# EAGLE board ArduinoShield-RFEngine-LLC-v00 (EAGLE 5.11)
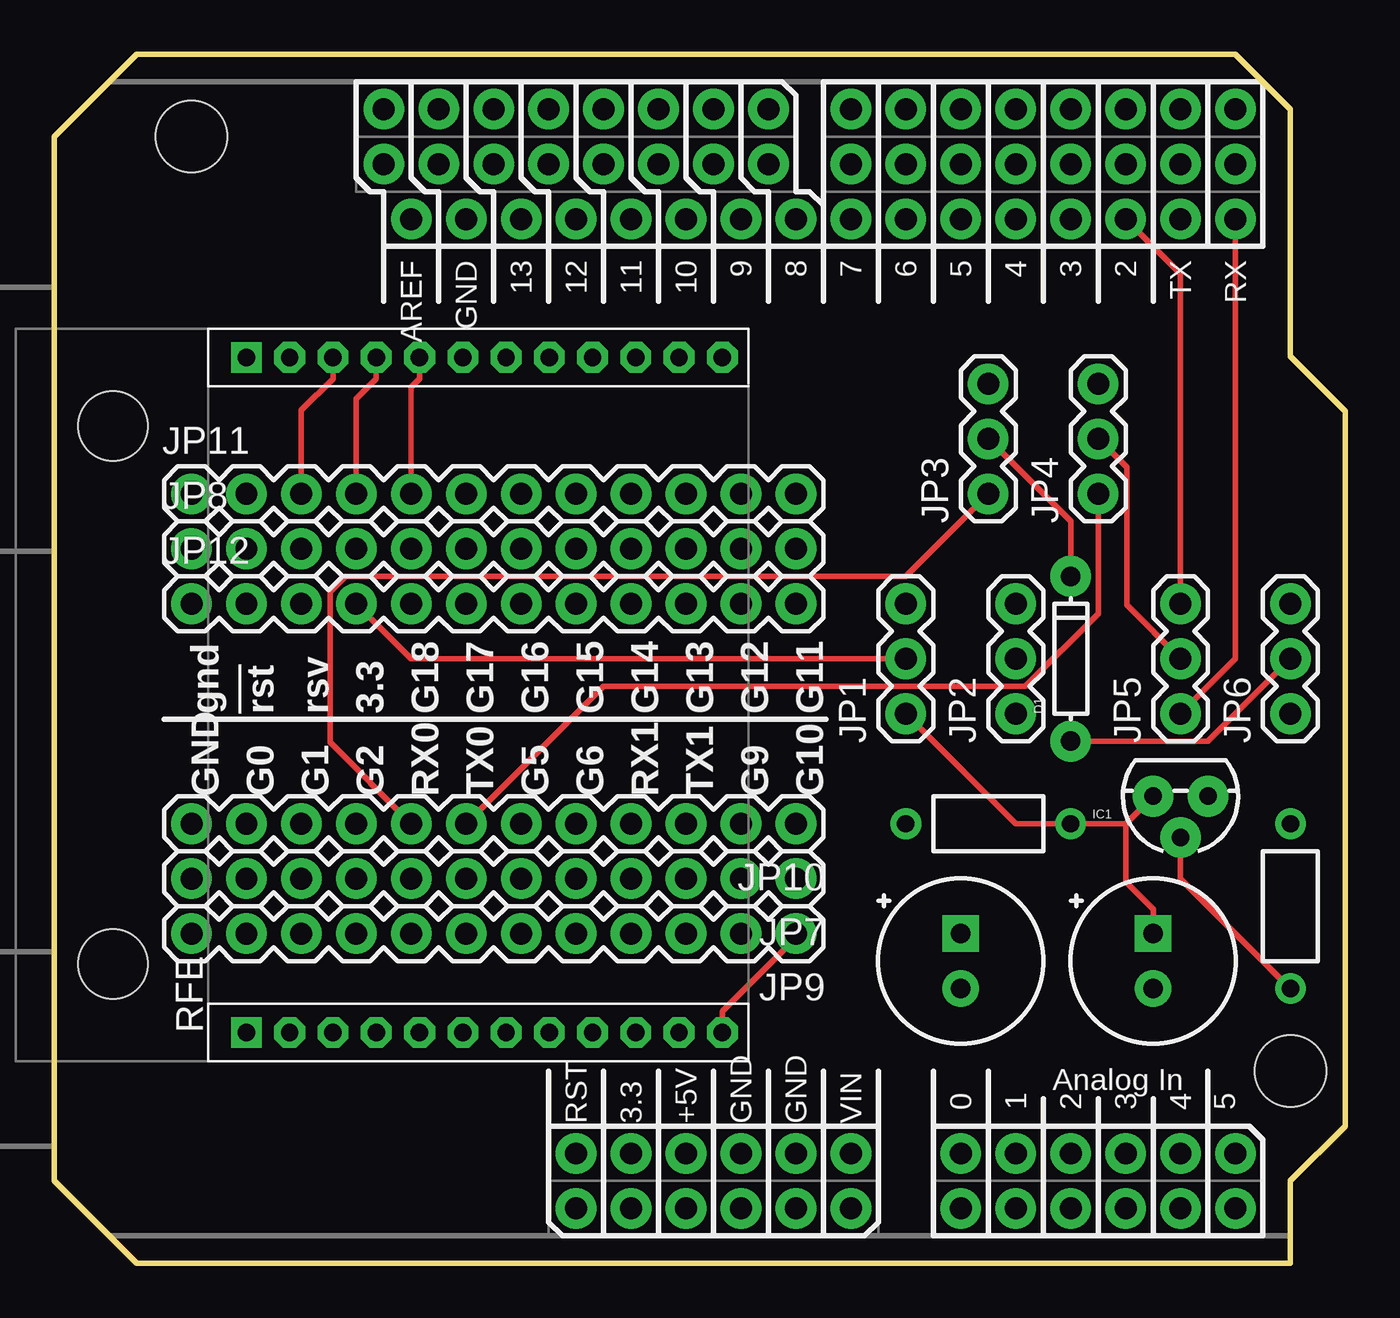
[diagram p0: board, top side]
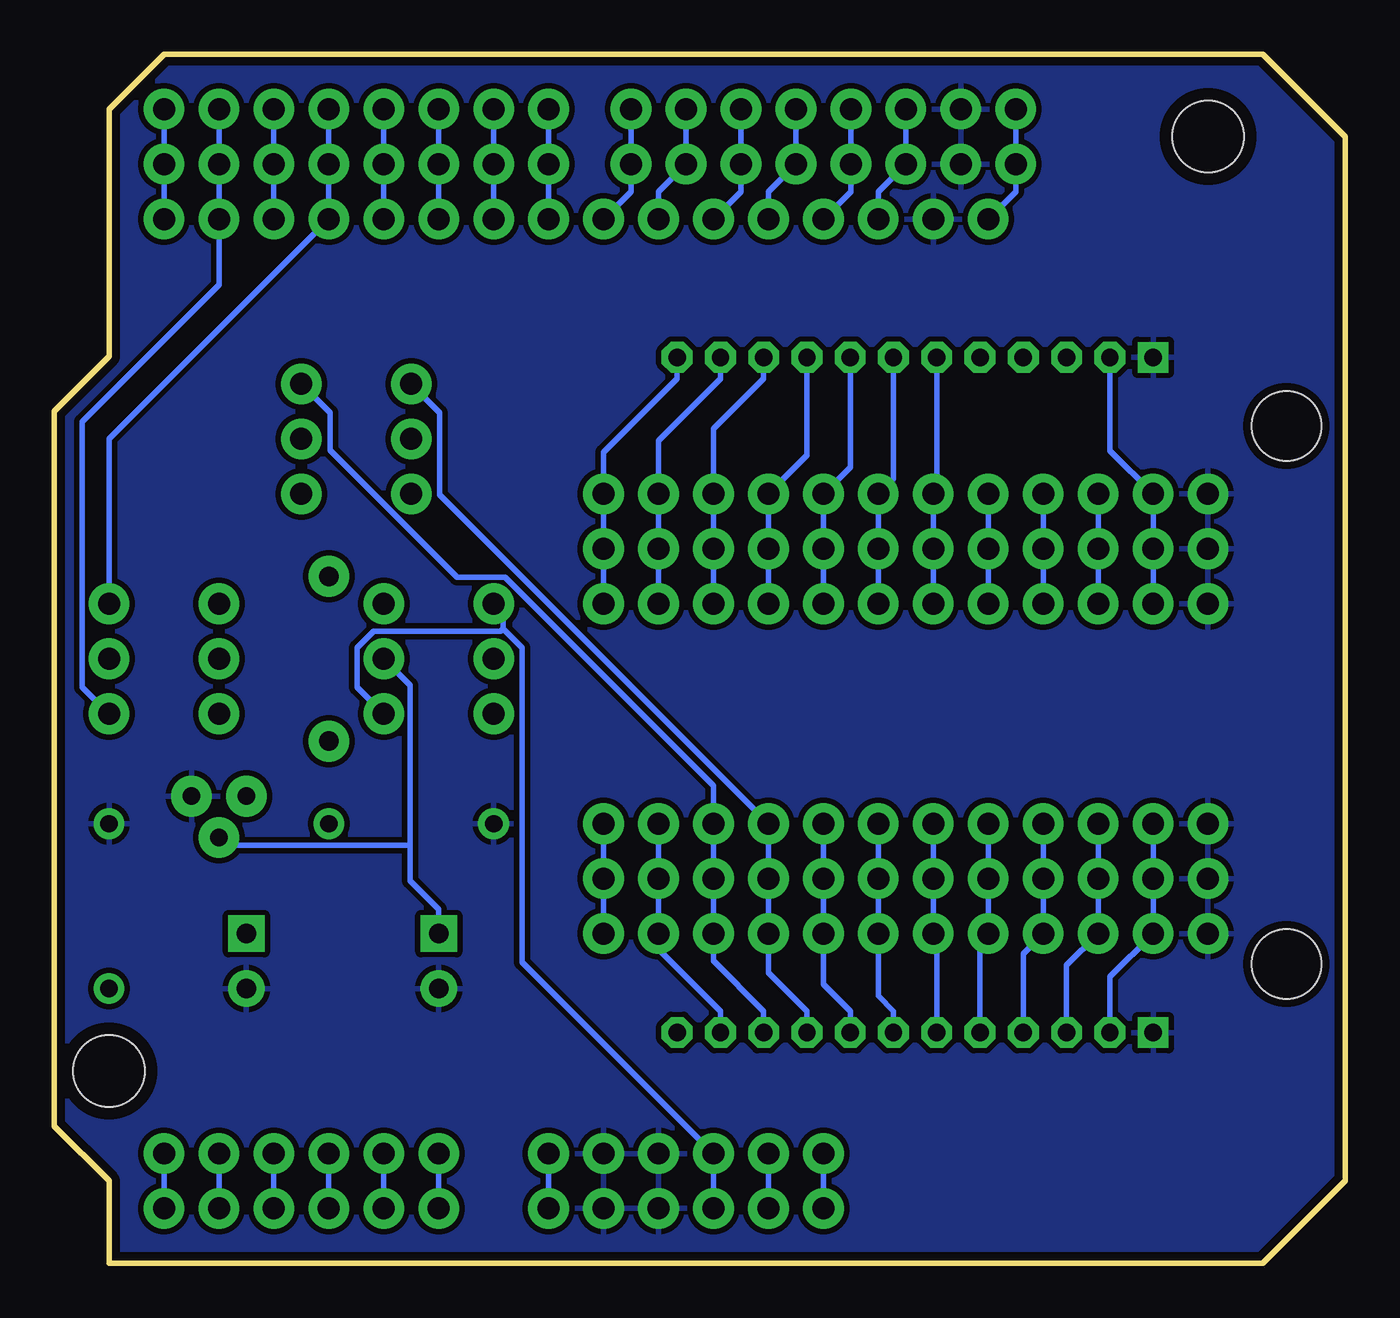
[diagram p1: board, bottom side, seen from below]

Size 59.69 x 55.88 mm. Coordinates in mm from the lower left corner, seen from the top.
Outline: 0,52.07 0,3.81 3.81,0 57.15,0 57.15,3.81 59.69,6.35 59.69,39.37 57.15,41.91 57.15,53.34 54.61,55.88 3.81,55.88 0,52.07
Copper layers (1*16): Top 0.0356mm / dielectric 1.5011mm / Bottom 0.0356mm
Design rules "LaenPCBOrder-JCModified": minimum track width 6mil, minimum drill 13mil, track to track 6mil, track to pad 6mil, pad to pad 6mil, via to via 6mil, smd to smd 6mil, copper to edge 15mil, drill to drill 6mil, minimum pad ring 12mil, minimum via ring 7mil, stop-mask expansion 4mil, vias tented up to drill 25mil, thermal gap 10mil
Net classes: 0 default: width 0.254 mm; 1 small_sig: width 0.152 mm

## Footprints (pad centres in the part's own frame; a part is rotated, then mirrored left to right if it is on the bottom)
DIODE-1N4148 = drill 0.9 pad 1.88 round: A -3.81,0; C 3.81,0
TO-92 = drill 0.813 pad 1.88 round: 1 -1.27,0; 2 0,1.905; 3 1.27,0
1X03 = drill 1.016 pad 1.88 round: 1 0,0; 2 2.54,0; 3 5.08,0
1X12 = drill 1.016 pad 1.88 round: 1 0,0; 2 2.54,0; 3 5.08,0; 4 7.62,0; 5 10.16,0; 6 12.7,0; 7 15.24,0; 8 17.78,0; 9 20.32,0; 10 22.86,0; 11 25.4,0; 12 27.94,0
SYNAPSERFENGINE-THM = drill 0.8 square: 1 0,0; 24 31.2,0 | drill 0.8 pad 1.422 octagon: 2 0,-2; 3 0,-4; 4 0,-6; 5 0,-8; 6 0,-10; 7 0,-12; 8 0,-14; 9 0,-16; 10 0,-18; 11 0,-20; 12 0,-22; 13 31.2,-22; 14 31.2,-20; 15 31.2,-18; 16 31.2,-16; 17 31.2,-14; 18 31.2,-12; 19 31.2,-10; 20 31.2,-8; 21 31.2,-6; 22 31.2,-4; 23 31.2,-2 | hole 3.2: 3.17,6.16; 28.03,6.16
DUEMILANOVE_SHIELD = drill 1.016 pad 1.88 round: 3.3V 52.07,26.67; 3.3V@1 49.53,26.67; 5V 52.07,29.21; 5V@1 49.53,29.21; A0 52.07,41.91; A0@1 49.53,41.91; A1 52.07,44.45; A1@1 49.53,44.45; A2 52.07,46.99; A2@1 49.53,46.99; A3 52.07,49.53; A3@1 49.53,49.53; A4 52.07,52.07; A4@1 49.53,52.07; A5 52.07,54.61; A5@1 49.53,54.61; AREF 3.81,15.24; AREF@1 6.35,16.51; AREF@2 1.27,15.24; D2 3.81,49.53; D2@1 6.35,49.53; D2@2 1.27,49.53; D3 3.81,46.99; D3@1 6.35,46.99; D3@2 1.27,46.99; D4 3.81,44.45; D4@1 6.35,44.45; D4@2 1.27,44.45; D5 3.81,41.91; D5@1 6.35,41.91; D5@2 1.27,41.91; D6 3.81,39.37; D6@1 6.35,39.37; D6@2 1.27,39.37; D7 3.81,36.83; D7@1 6.35,36.83; D7@2 1.27,36.83; D8 3.81,33.02; D8@1 6.35,34.29; D8@2 1.27,33.02; D9 3.81,30.48; D9@1 6.35,31.75; D9@2 1.27,30.48; D10 3.81,27.94; D10@1 6.35,29.21; D10@2 1.27,27.94; D11 3.81,25.4; D11@1 6.35,26.67; D11@2 1.27,25.4; D12 3.81,22.86; D12@1 6.35,24.13; D12@2 1.27,22.86; D13 3.81,20.32; D13@1 6.35,21.59; D13@2 1.27,20.32; GND 52.07,31.75; GND@1 52.07,34.29; GND@2 3.81,17.78; GND@3 49.53,31.75; GND@4 49.53,34.29; GND@5 6.35,19.05; GND@6 1.27,17.78; RES 52.07,24.13; RES@1 49.53,24.13; RX 3.81,54.61; RX@1 6.35,54.61; RX@2 1.27,54.61; TX 3.81,52.07; TX@1 6.35,52.07; TX@2 1.27,52.07; VIN 52.07,36.83; VIN@1 49.53,36.83 | hole 3.302: 45.72,57.15; 2.54,6.35
OCTOMINI_CAPDIELEC = drill 0.9 pad 1.676 square: 1 0,0 | drill 0.9 pad 1.676 round: 2 0,-2.54
OCTOMINI_CAPCERAM = drill 0.8 pad 1.422 round: 1 0,0; 2 7.62,0

## Placement (x,y rotation side)
D1  [DIODE-1N4148]  46.99,27.94 90 top
IC1  [TO-92]  52.07,21.59 180 top
JP1  JUMPER-3PTH  [1X03]  39.37,25.4 90 top
JP2  JUMPER-3PTH  [1X03]  44.45,25.4 90 top
JP3  JUMPER-3PTH  [1X03]  43.18,35.56 90 top
JP4  JUMPER-3PTH  [1X03]  48.26,35.56 90 top
JP5  JUMPER-3PTH  [1X03]  52.07,25.4 90 top
JP6  JUMPER-3PTH  [1X03]  57.15,25.4 90 top
JP7  M12PTH  [1X12]  34.29,17.78 180 top
JP8  M12PTH  [1X12]  6.35,33.02 0 top
JP9  M12PTH  [1X12]  34.29,15.24 180 top
JP10  M12PTH  [1X12]  34.29,20.32 180 top
JP11  M12PTH  [1X12]  6.35,35.56 0 top
JP12  M12PTH  [1X12]  6.35,30.48 0 top
RFE  RFE  [SYNAPSERFENGINE-THM]  8.89,10.67 90 top
U1  ARDUINO_SHIELDLABEL  [DUEMILANOVE_SHIELD]  0,54.61 270 top
U$1  OCTOMINI_CAPDIELEC  [OCTOMINI_CAPDIELEC]  50.8,15.24 0 top
U$2  OCTOMINI_CAPDIELEC  [OCTOMINI_CAPDIELEC]  41.91,15.24 0 top
U$4  OCTOMINI_CAPCERAM  [OCTOMINI_CAPCERAM]  57.15,12.7 90 top
U$5  OCTOMINI_CAPCERAM  [OCTOMINI_CAPCERAM]  46.99,20.32 180 top

## Library data of the parts
D1 IC1 RFE U1 = 0_jc-custom
JP1-JP12 = SparkFun
U$1 U$2 U$4 U$5 = Amani_64_1d0

## Nets
A0: U1.A0 U1.A0@1
A1: U1.A1 U1.A1@1
A2: U1.A2 U1.A2@1
A3: U1.A3 U1.A3@1
A4: U1.A4 U1.A4@1
A5: U1.A5 U1.A5@1
D0: JP5.1 U1.RX U1.RX@1 U1.RX@2
D1: JP6.1 U1.TX U1.TX@1 U1.TX@2
D2: JP5.3 U1.D2 U1.D2@1 U1.D2@2
D3: JP6.3 U1.D3 U1.D3@1 U1.D3@2
D4: U1.D4 U1.D4@1 U1.D4@2
D5: U1.D5 U1.D5@1 U1.D5@2
D6: U1.D6 U1.D6@1 U1.D6@2
D7: U1.D7 U1.D7@1 U1.D7@2
D8: U1.D8 U1.D8@1 U1.D8@2
D9: U1.D9 U1.D9@1 U1.D9@2
D10: U1.D10 U1.D10@1 U1.D10@2
D11: U1.D11 U1.D11@1 U1.D11@2
D12: U1.D12 U1.D12@1 U1.D12@2
D13: U1.D13 U1.D13@1 U1.D13@2
G0: JP7.11 JP9.11 JP10.11 RFE.2
G1: JP7.10 JP9.10 JP10.10 RFE.3
G2: JP7.9 JP9.9 JP10.9 RFE.4
G5: JP7.6 JP9.6 JP10.6 RFE.7
G6: JP7.5 JP9.5 JP10.5 RFE.8
G9: JP7.2 JP9.2 JP10.2 RFE.11
G10: JP7.1 JP9.1 JP10.1 RFE.12
G11: JP8.12 JP11.12 JP12.12 RFE.13
G12: JP8.11 JP11.11 JP12.11 RFE.14
G13: JP8.10 JP11.10 JP12.10 RFE.15
G14: JP8.9 JP11.9 JP12.9 RFE.16
G15: JP8.8 JP11.8 JP12.8 RFE.17
G16: JP8.7 JP11.7 JP12.7 RFE.18
G17: JP8.6 JP11.6 JP12.6 RFE.19
G18: JP8.5 JP11.5 JP12.5 RFE.20
G19: JP8.3 JP11.3 JP12.3 RFE.22
GND: IC1.1 JP7.12 JP8.1 JP9.12 JP10.12 JP11.1 JP12.1 RFE.1 RFE.24 U1.GND U1.GND@1 U1.GND@2 U1.GND@3 U1.GND@4 U1.GND@5 U1.GND@6 U$1.2 U$2.2 U$4.2 U$5.2
N$1: JP2.3
N$4: U1.AREF U1.AREF@1 U1.AREF@2
N$5: U1.RES U1.RES@1
N$17: U1.VIN U1.VIN@1
N$19: U1.3.3V U1.3.3V@1
SRST: JP8.2 JP11.2 JP12.2 RFE.23
SRX: D1.A JP6.2
SRX0: JP3.1 JP7.8 JP9.8 JP10.8 RFE.5
SRX1: JP3.3 JP7.4 JP9.4 JP10.4 RFE.9
SRXD: D1.C JP3.2
STX: JP4.2 JP5.2
STX0: JP4.1 JP7.7 JP9.7 JP10.7 RFE.6
STX1: JP4.3 JP7.3 JP9.3 JP10.3 RFE.10
VCC3: JP1.2 JP8.4 JP11.4 JP12.4 RFE.21
VCC5: JP1.3 JP2.1 U1.5V U1.5V@1
VR33: IC1.3 JP1.1 U$1.1 U$5.1
VRIN: IC1.2 JP2.2 U$2.1 U$4.1

## Tracks (layer width: path | path; a pad name or v marks a point on that pad's centre or on a via)
A0
  Bottom 0.254: U1.A0 U1.A0@1
A1
  Bottom 0.254: U1.A1 U1.A1@1
A2
  Bottom 0.254: U1.A2 U1.A2@1
A3
  Bottom 0.254: U1.A3 U1.A3@1
A4
  Bottom 0.254: U1.A4 U1.A4@1
A5
  Bottom 0.254: U1.A5 U1.A5@1
D0
  Top 0.254: U1.RX@1 54.61,27.94 JP5.1
  Bottom 0.254: U1.RX@1 U1.RX U1.RX@2
D1
  Bottom 0.254: JP6.1 58.38,26.63 58.38,38.9 52.07,45.21 U1.TX@1 U1.TX U1.TX@2
D2
  Top 0.254: U1.D2@1 52.07,45.72 JP5.3
  Bottom 0.254: U1.D2@1 U1.D2 U1.D2@2
D3
  Bottom 0.254: JP6.3 57.15,38.1 U1.D3@1 U1.D3 U1.D3@2
D4
  Bottom 0.254: U1.D4@1 U1.D4 U1.D4@2
D5
  Bottom 0.254: U1.D5@1 U1.D5 U1.D5@2
D6
  Bottom 0.254: U1.D6@1 U1.D6 U1.D6@2
D7
  Bottom 0.254: U1.D7@1 U1.D7 U1.D7@2
D8
  Bottom 0.254: U1.D8@1 33.02,49.53 U1.D8 U1.D8@2
D9
  Bottom 0.254: U1.D9@1 31.75,49.53 U1.D9 U1.D9@2
D10
  Bottom 0.254: U1.D10@1 27.94,49.53 U1.D10 U1.D10@2
D11
  Bottom 0.254: U1.D11@1 26.67,49.53 U1.D11 U1.D11@2
D12
  Bottom 0.254: U1.D12@1 22.86,49.53 U1.D12 U1.D12@2
D13
  Bottom 0.254: U1.D13@1 21.59,49.53 U1.D13 U1.D13@2
G0
  Bottom 0.254: RFE.2 10.89,13.24 JP9.11 JP7.11 JP10.11
G1
  Bottom 0.254: RFE.3 12.89,13.78 JP9.10 JP7.10 JP10.10
G2
  Bottom 0.254: RFE.4 14.89,14.32 JP9.9 JP7.9 JP10.9
G5
  Bottom 0.254: JP10.6 JP7.6 JP9.6 21.59,12.36 20.89,11.66 RFE.7
G6
  Bottom 0.254: JP10.5 JP7.5 JP9.5 24.13,12.9 22.89,11.66 RFE.8
G9
  Bottom 0.254: JP10.2 JP7.2 JP9.2 31.75,14.52 28.89,11.66 RFE.11
G10
  Top 0.254: RFE.12 30.89,11.66 34.29,15.06 JP9.1
  Bottom 0.254: JP9.1 JP7.1 JP10.1
G11
  Bottom 0.254: JP12.12 JP8.12 JP11.12 34.29,37.48 30.89,40.88 RFE.13
G12
  Bottom 0.254: JP12.11 JP8.11 JP11.11 31.75,38.02 28.89,40.88 RFE.14
G13
  Bottom 0.254: JP12.10 JP8.10 JP11.10 29.21,38.56 26.89,40.88 RFE.15
G14
  Bottom 0.254: RFE.16 24.89,37.34 JP11.9 JP8.9 JP12.9
G15
  Bottom 0.254: RFE.17 22.89,36.8 JP11.8 JP8.8 JP12.8
G16
  Bottom 0.254: RFE.18 20.89,36.26 JP11.7 JP8.7 JP12.7
G17
  Bottom 0.254: RFE.19 18.89,35.72 JP11.6 JP8.6 JP12.6
G18
  Top 0.254: RFE.20 16.89,40.88 16.51,40.5 JP11.5
  Bottom 0.254: JP11.5 JP8.5 JP12.5
G19
  Top 0.254: RFE.22 12.89,40.88 11.43,39.42 JP11.3
  Bottom 0.254: JP11.3 JP8.3 JP12.3
GND
  pour Bottom (isolate 0.254): 0,55.88 0,3.81 3.81,0 57.15,0 57.15,3.81 59.69,6.35 59.69,39.37 57.15,41.91 57.15,53.34 54.61,55.88
N$4
  Bottom 0.254: U1.AREF@1 15.24,49.53 U1.AREF U1.AREF@2
N$5
  Bottom 0.254: U1.RES U1.RES@1
N$17
  Bottom 0.254: U1.VIN U1.VIN@1
N$19
  Bottom 0.254: U1.3.3V U1.3.3V@1
SRST
  Bottom 0.254: RFE.23 10.89,37.56 JP11.2 JP8.2 JP12.2
SRX
  Top 0.254: JP6.2 53.34,24.13 D1.A
SRX0
  Top 0.254: JP10.8 12.75,24.08 12.75,31.03 13.47,31.75 39.37,31.75 JP3.1
  Bottom 0.254: RFE.5 16.89,14.86 JP9.8 JP7.8 JP10.8
SRX1
  Bottom 0.254: JP3.3 41.86,39.32 41.86,35.51 JP10.4 JP7.4 JP9.4 26.67,13.44 24.89,11.66 RFE.9
SRXD
  Top 0.254: JP3.2 46.99,34.29 D1.C
STX
  Top 0.254: JP5.2 49.58,30.43 49.58,36.78 JP4.2
STX0
  Top 0.254: JP10.7 25.4,26.67 44.91,26.67 48.26,30.02 JP4.1
  Bottom 0.254: RFE.6 18.89,15.08 JP9.7 JP7.7 JP10.7
STX1
  Bottom 0.254: JP4.3 46.94,39.32 46.94,37.57 41.07,31.7 38.84,31.7 29.21,22.07 JP10.3 JP7.3 JP9.3 29.21,13.98 26.89,11.66 RFE.10
VCC3
  Top 0.254: JP12.4 16.51,27.94 JP1.2 | RFE.21 14.89,40.88 13.97,39.96 JP11.4
  Bottom 0.254: JP11.4 JP8.4 JP12.4
VCC5
  Bottom 0.254: 38.94,29.33 38.94,30.05 JP1.3 | JP2.1 45.67,26.62 45.67,28.45 44.91,29.21 39.06,29.21 38.94,29.33 | 38.94,29.33 38.05,28.44 38.05,13.92 U1.5V@1 U1.5V
VR33
  Top 0.254: U$1.1 50.8,16.36 49.53,17.63 49.53,20.32 | 49.53,20.32 IC1.3 | 49.53,20.32 U$5.1 44.45,20.32 JP1.1
VRIN
  Top 0.254: U$4.1 52.07,17.78 IC1.2
  Bottom 0.254: U$2.1 41.91,16.36 43.23,17.67 43.23,19.32 | 43.23,19.32 43.23,26.72 JP2.2 | IC1.2 51.7,19.32 43.23,19.32

## Text on the board
tPlace: gnd | !rst | rsv | 3.3 | G18 | G17 | G16 | G15 | G14 | G13 | G12 | G11 | GND | G0 | G1 | G2 | RX0 | TX0 | G5 | G6 | RX1 | TX1 | G9 | G10